# Altium PCB PCB1.PcbDoc
Units mm, origin at the board's own origin, x right, y up, seen from the top; angles counter-clockwise.
Board outline 164.2 x 225.1 mm, 2 copper layers (Top Layer, Bottom Layer); 32 components, 42 nets, 234 pads, 0 vias.
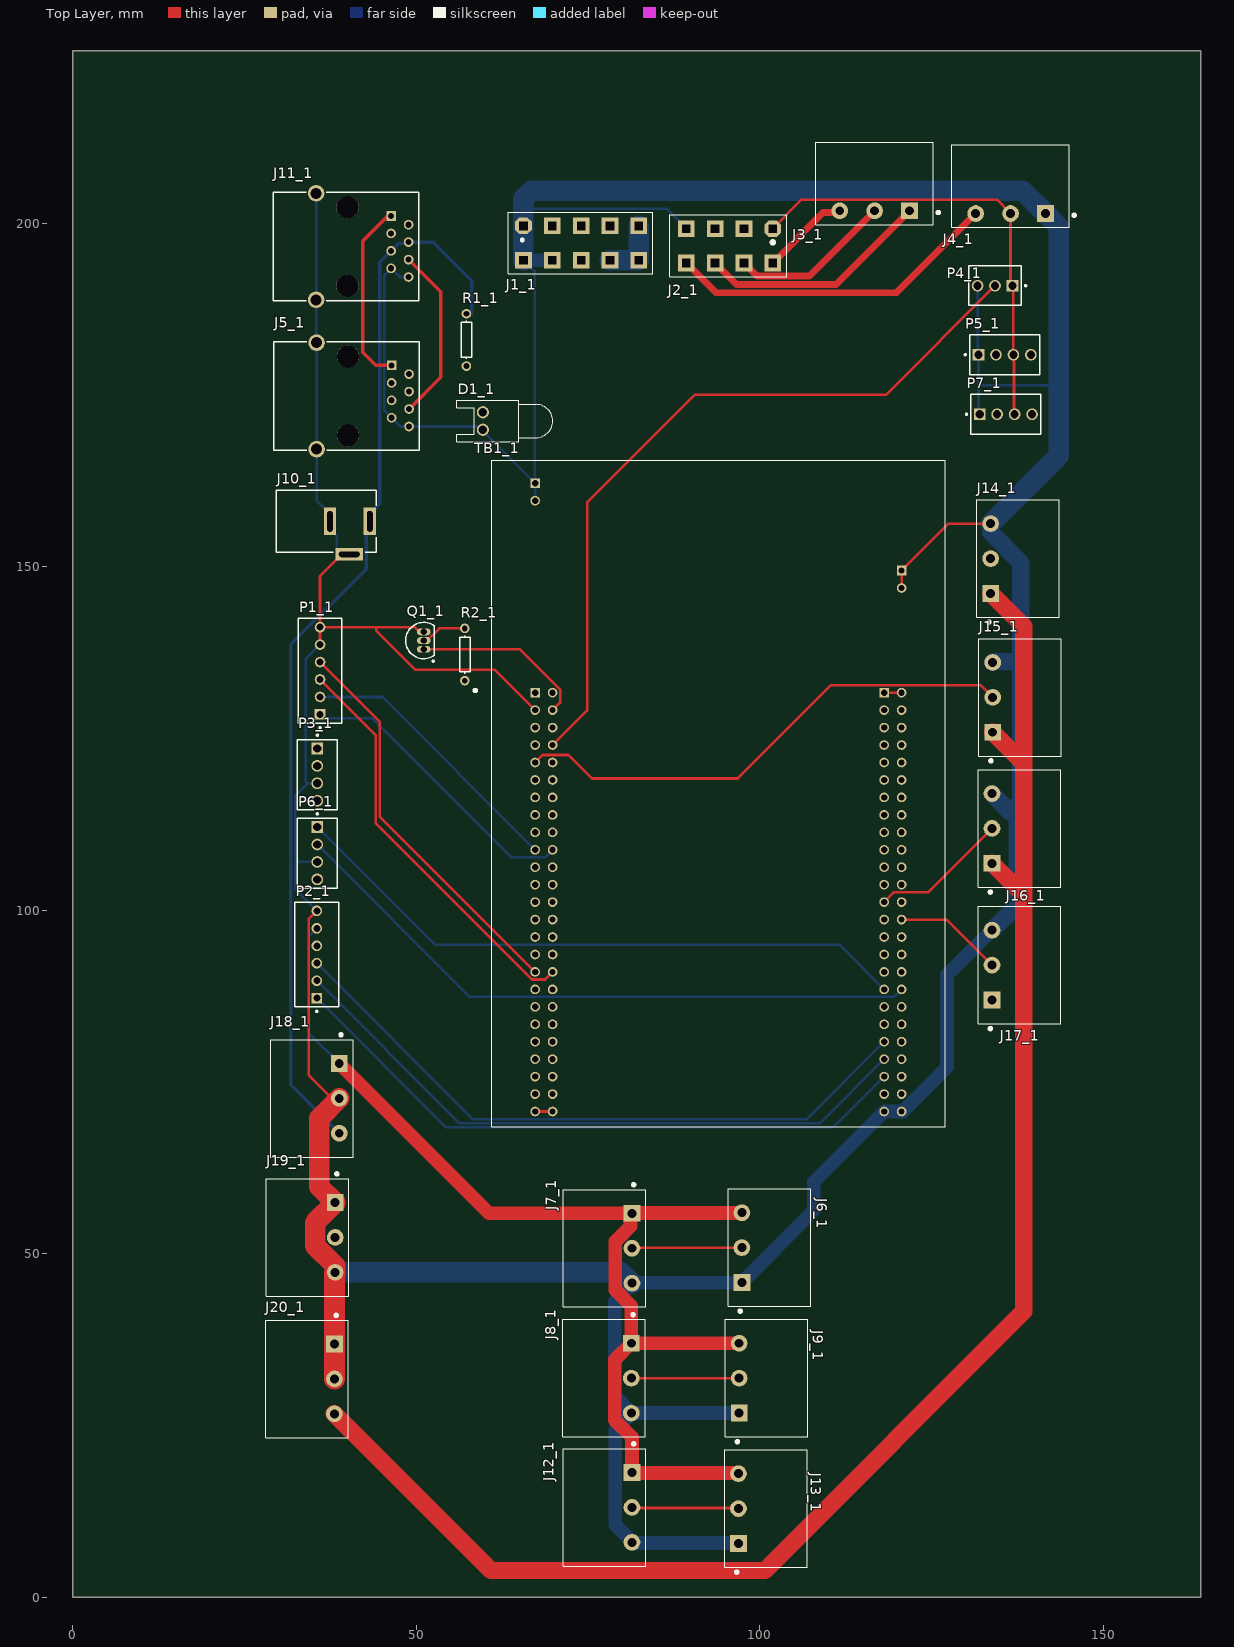
[diagram p0: Top Layer view]
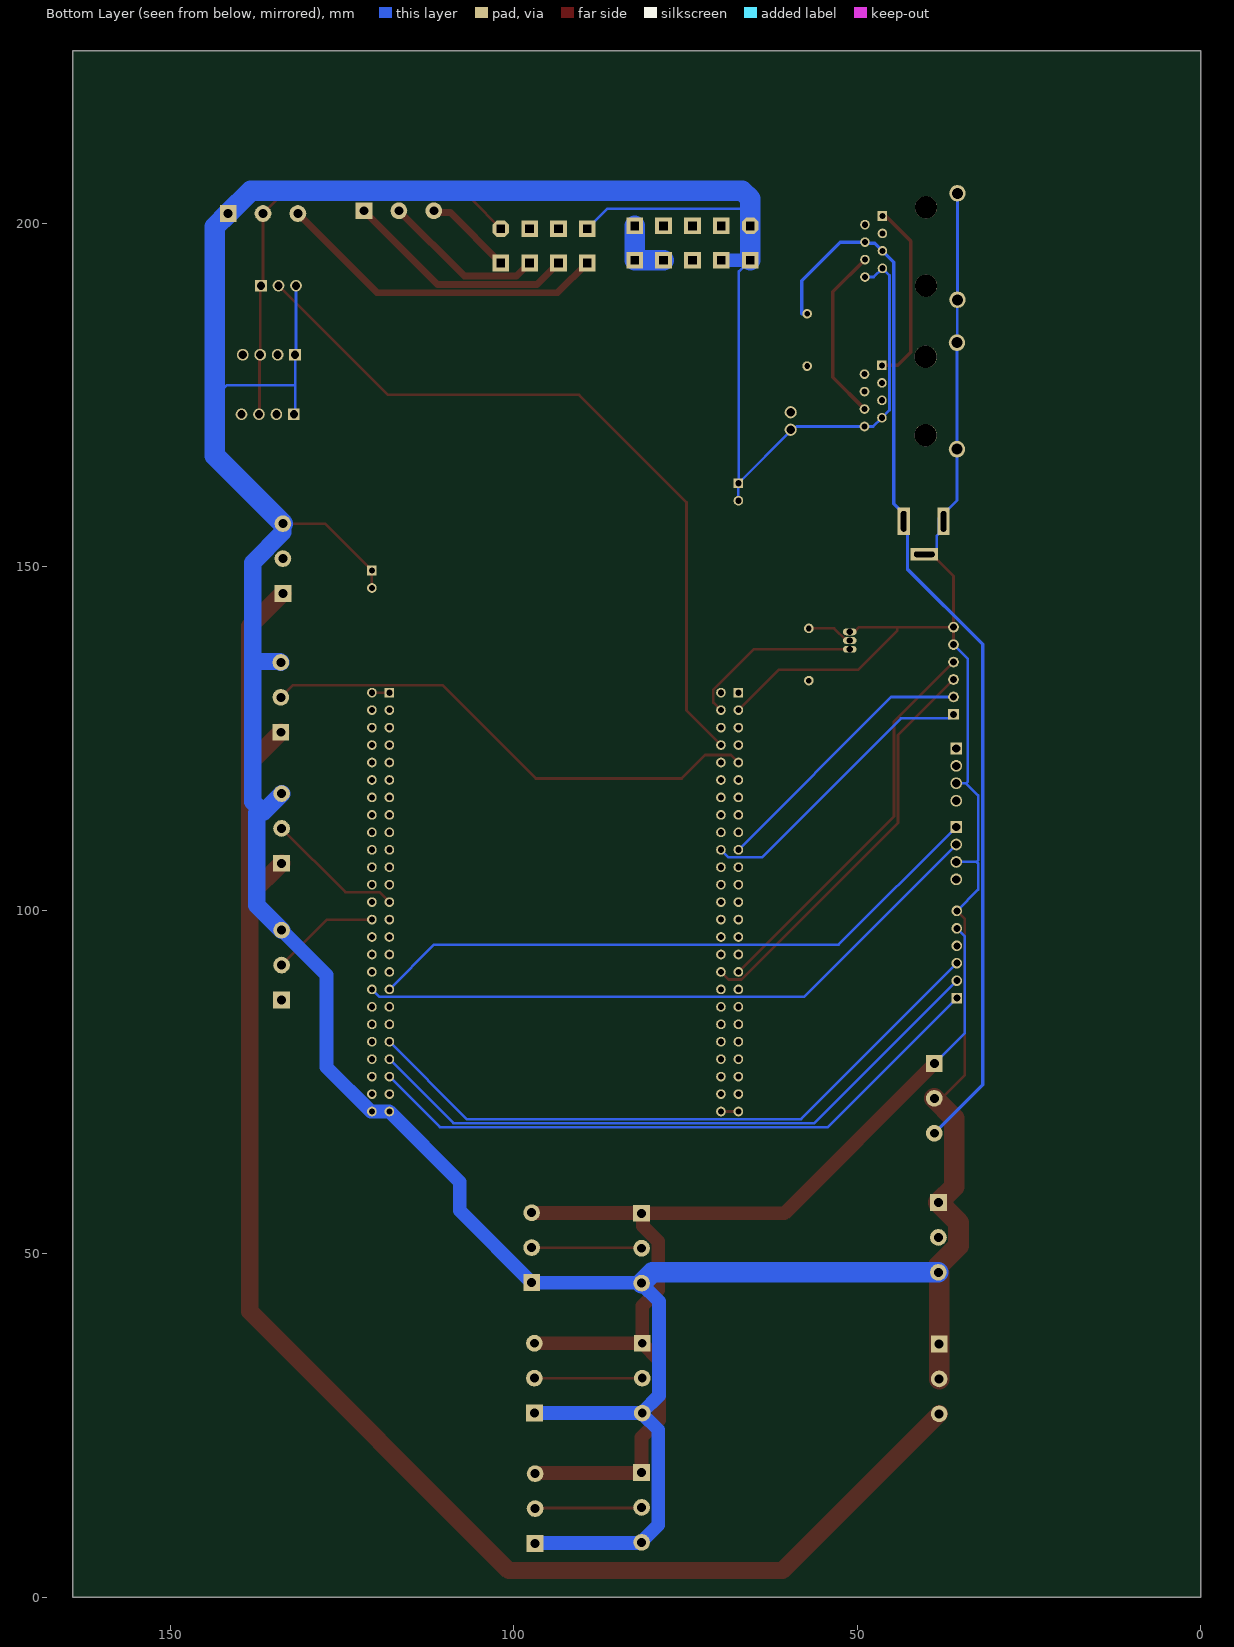
[diagram p1: Bottom Layer view, seen from below]

## Layer stack, top to bottom
Top Solder: solder mask 0.0102, Solder Resist, Dk 3.5
Top Layer: signal copper 0.0356
Dielectric 1: dielectric 0.32, FR-4, Dk 4.8
Bottom Layer: signal copper 0.0356
Bottom Solder: solder mask 0.0102, Solder Resist, Dk 3.5

## Board outline
0,0 164.2,0 164.2,225.1 0,225.1

## Design rules (kind name [scope] priority, off if disabled: settings)
Clearance [All] p1: gap=0.254 ignorepadtopadclearanceinfootprint=FALSE except(0: Arc-Hole Track-Hole SMDPad-Hole THPad-Hole Via-Hole Fill-Hole Poly-Hole Region-Hole Text-Hole)
PolygonConnect [All] p1: connectstyle=Relief reliefconductorwidth=0.254 reliefentries=4 polygonreliefangle="90 Angle" airgapwidth=0.254
RoutingVias [All] p1: holewidth=0.711 width=1.27 viastyle="Through Hole" minholewidth=0.711 minwidth=1.27 maxholewidth=0.711 maxwidth=1.27
SolderMaskExpansion [All] p1: expansion=0.102
Width [All] p1: maxlimit=0.254 minlimit=0.254 preferedwidth=0.254
30 further rules are at their usual default settings.

## Components (designator, comment, footprint, x,y, rotation, side; value= is the part's Value field where it differs from the comment)
D1_1 "LED0" LED-0 59.7,171.2 r90 top (schematic designator D1)
J1_1 "10 PIN MOLEX CLON" "10 pin molex" 82.4,199.6 r180 top (schematic designator J1)
J2_1 "8 PIN molex CLON" "8 PIN MOLEX CLON" 101.9,199.2 r180 top (schematic designator J2)
J3_1 "3 PIN GREEN" PHOENIX_MSTBA_2,5_3-G-5,08_1757255 116.72,201.8 r180 top (schematic designator J3)
J4_1 "3 PIN GREEN" PHOENIX_MSTBA_2,5_3-G-5,08_1757255 136.5,201.4 r180 top (schematic designator J4)
J5_1 "61500814221" 61500814221 39.87,174.85 r270 top (schematic designator J5)
J6_1 "3 PIN GREEN" PHOENIX_MSTBA_2,5_3-G-5,08_1757255 97.4,50.9 r90 top (schematic designator J6)
J7_1 "3 PIN GREEN" PHOENIX_MSTBA_2,5_3-G-5,08_1757255 81.4,50.8 r270 top (schematic designator J7)
J8_1 "3 PIN GREEN" PHOENIX_MSTBA_2,5_3-G-5,08_1757255 81.3,31.9 r270 top (schematic designator J8)
J9_1 "3 PIN GREEN" PHOENIX_MSTBA_2,5_3-G-5,08_1757255 97,31.9 r90 top (schematic designator J9)
J10_1 "694108301002" 694108301002 36.9,156.6 r270 top (schematic designator J10)
J11_1 "61500814221" 61500814221 39.8,196.6 r270 top (schematic designator J11)
J12_1 "3 PIN GREEN" PHOENIX_MSTBA_2,5_3-G-5,08_1757255 81.4,13.08 r270 top (schematic designator J12)
J13_1 "3 PIN GREEN" PHOENIX_MSTBA_2,5_3-G-5,08_1757255 96.9,12.92 r90 top (schematic designator J13)
J14_1 "3 PIN GREEN" PHOENIX_MSTBA_2,5_3-G-5,08_1757255 133.6,151.18 r90 top (schematic designator J14)
J15_1 "3 PIN GREEN" PHOENIX_MSTBA_2,5_3-G-5,08_1757255 133.9,130.98 r90 top (schematic designator J15)
J16_1 "3 PIN GREEN" PHOENIX_MSTBA_2,5_3-G-5,08_1757255 133.8,111.9 r90 top (schematic designator J16)
J17_1 "3 PIN GREEN" PHOENIX_MSTBA_2,5_3-G-5,08_1757255 133.8,92.02 r90 top (schematic designator J17)
J18_1 "3 PIN GREEN" PHOENIX_MSTBA_2,5_3-G-5,08_1757255 38.8,72.62 r270 top (schematic designator J18)
J19_1 "3 PIN GREEN" PHOENIX_MSTBA_2,5_3-G-5,08_1757255 38.2,52.375 r270 top (schematic designator J19)
J20_1 "3 PIN GREEN" PHOENIX_MSTBA_2,5_3-G-5,08_1757255 38.1,31.78 r270 top (schematic designator J20)
P1_1 "22-23-2061" MOLX-22-23-2061_V 36,134.85 r90 top (schematic designator P1)
P2_1 "22-23-2061" MOLX-22-23-2061_V 35.525,93.555 r90 top (schematic designator P2)
P3_1 "22-27-2041" MOLX-22-27-2041_V 35.6,119.739 r90 top (schematic designator P3)
P4_1 "22-27-2031" MOLX-22-27-2031_V 134.24,190.9 r180 top (schematic designator P4)
P5_1 "22-27-2041" MOLX-22-27-2041_V 135.645,180.85 r180 top (schematic designator P5)
P6_1 "22-27-2041" MOLX-22-27-2041_V 35.6,108.3 r90 top (schematic designator P6)
P7_1 "22-27-2041" MOLX-22-27-2041_V 135.82,172.175 r180 top (schematic designator P7)
Q1_1 "NPN" TO-226-AA 51.1,139.25 r0 top (schematic designator Q1)
R1_1 "Res1" AXIAL-0.3 57.3,183 r90 top value=1K (schematic designator R1)
R2_1 "Res1" AXIAL-0.3 57.064,137.215 r90 top value=1K (schematic designator R2)
TB1_1 "STM32F3DISCOVERY" SHIELD_STM32F3DISCOVERY 93.98,116.98 r0 top (schematic designator TB1)

## Footprints (in the part's own frame and the unit in brackets; to place one, negate y for a bottom-side part, rotate by r counter-clockwise, add the part's x,y. Pads: shape width x height; smd on the part's side, far side on the other; paste and mask are expansions set on the pad)
"8 PIN MOLEX CLON" [mm]
  oct 2.43x2.43 hole 1.2 square: 1(0,0)
  rect 2.43x2.43 hole 1.2 square: 2(4.2,0) 3(8.4,0) 4(12.6,0) 5(12.6,5) 6(8.4,5) 7(4.2,5) 8(0,5)
  silkscreen extent -2,-2 15,7, body extent -2.95,-13.5 15.15,5.5, height 11
"10 pin molex" [mm]
  oct 2.43x2.43 hole 1.2 square: 1(16.8,0)
  rect 2.43x2.43 hole 1.2 square: 2(12.6,0) 3(8.4,0) 4(4.2,0) 5(0,0) 6(16.8,5) 7(12.6,5) 8(8.4,5) 9(4.2,5) 10(0,5)
  silkscreen extent -2,-2 19,7, body extent -3.1,-13.6 19.3,5.4, height 11
61500814221 [mm] "Modular Jack Horizontal Shielded 8P8C Tab Down"
  rect 1.4x1.4 hole 0.9: 1(-4.445,6.55)
  round 1.4 hole 0.9: 2(-3.175,9.09) 3(-1.905,6.55) 4(-0.635,9.09) 5(0.635,6.55) 6(1.905,9.09) 7(3.175,6.55) 8(4.445,9.09)
  round 3.25 hole 3.25 unplated: MH1(-5.715,0.2) MH2(5.715,0.2)
  round 2.4 hole 1.6: S1(-7.75,-4.37) S2(7.75,-4.37)
  silkscreen extent -7.92,-10.6 7.92,10.6, body extent -7.9,-10.6 7.9,10.6, height 13.7
694108301002 [mm] "DC Power Jack Right Angled(6.4)"
  rect 4x1.8 hole 0.8 slot 3 at 0 deg: 1(0,6.35) 2(0,0.55)
  rect 1.8x4 hole 0.8 slot 3 at 90 deg: 3(4.8,3.35)
  silkscreen extent -4.5,-7.25 4.5,7.25, body extent -4.5,-7.25 5,7.25, height 10.75
AXIAL-0.3 [mm] "Axial Device, Thru-Hole; 2 Leads; 0.3 in Pin Spacing"
  round 1.4 hole 0.85: 1(-3.81,0) 2(3.81,0)
  silkscreen extent -2.77,-0.76 2.77,0.76
LED-0 [mil] "LED; 2 Leads"
  round 70 hole 50: 1(50,0) 2(-50,0)
  silkscreen extent -120,-400 120,150
MOLX-22-23-2061_V [mm] "THD, 6-Leads, Body 15.24x6.35mm, Pitch 2.54mm"
  rect 1.55x1.55 hole 1.02: 1(-6.35,0)
  round 1.55 hole 1.02: 2(-3.81,0) 3(-1.27,0) 4(1.27,0) 5(3.81,0) 6(6.35,0)
  silkscreen extent -8.39,-3.18 7.62,3.18, body extent -7.54,-3.25 7.54,3.1, height 10.67
MOLX-22-27-2031_V [mm] "Header, 3-Leads, Body 7.62x5.8mm, Pitch 2.54mm"
  rect 1.7x1.7 hole 1.19 paste+0: 1(-2.54,0)
  round 1.7 hole 1.19 paste+0: 2(0,0) 3(2.54,0)
  silkscreen extent -4.59,-2.92 3.81,2.88, body extent -3.81,-2.92 3.81,2.88, height 11.71
MOLX-22-27-2041_V [mm] "CONN, 4-Leads, Body 10.16x5.8mm, Pitch 2.54mm"
  rect 1.7x1.7 hole 1.19: 1(3.81,0)
  round 1.7 hole 1.19: 2(1.27,0) 3(-1.27,0) 4(-3.81,0)
  silkscreen extent -5.08,-2.9 5.85,2.9, body extent -5.08,-2.9 5.08,2.9, height 11.7
PHOENIX_MSTBA_2,5_3-G-5,08_1757255 [mm]
  rect 2.43x2.43 hole 1.3: 1(-5.08,0)
  round 2.43 hole 1.3: 2(0,0) 3(5.08,0)
  silkscreen extent -9.45,-10 8.54,2, body extent -7.62,-9.94 7.62,2.06, height 8.6
SHIELD_STM32F3DISCOVERY [mm]
  rect 1.408x1.408 hole 0.9: 1(-26.67,14.68) 51(24.13,14.68) 101(-26.67,45.16) 103(26.67,32.46)
  round 1.408 hole 0.9: 2(-24.13,14.68) 3(-26.67,12.14) 4(-24.13,12.14) 5(-26.67,9.6) 6(-24.13,9.6) 7(-26.67,7.06) 8(-24.13,7.06) 9(-26.67,4.52) 10(-24.13,4.52) 11(-26.67,1.98) 12(-24.13,1.98) 13(-26.67,-0.56) 14(-24.13,-0.56) 15(-26.67,-3.1) 16(-24.13,-3.1) 17(-26.67,-5.64) 18(-24.13,-5.64) 19(-26.67,-8.18) 20(-24.13,-8.18) 21(-26.67,-10.72) 22(-24.13,-10.72) 23(-26.67,-13.26) 24(-24.13,-13.26) 25(-26.67,-15.8) 26(-24.13,-15.8) 27(-26.67,-18.34) 28(-24.13,-18.34) 29(-26.67,-20.88) 30(-24.13,-20.88) 31(-26.67,-23.42) 32(-24.13,-23.42) 33(-26.67,-25.96) 34(-24.13,-25.96) 35(-26.67,-28.5) 36(-24.13,-28.5) 37(-26.67,-31.04) 38(-24.13,-31.04) 39(-26.67,-33.58) 40(-24.13,-33.58) 41(-26.67,-36.12) 42(-24.13,-36.12) 43(-26.67,-38.66) 44(-24.13,-38.66) 45(-26.67,-41.2) 46(-24.13,-41.2) 47(-26.67,-43.74) 48(-24.13,-43.74) 49(-26.67,-46.28) 50(-24.13,-46.28) 52(26.67,14.68) 53(24.13,12.14) 54(26.67,12.14) 55(24.13,9.6) 56(26.67,9.6) 57(24.13,7.06) 58(26.67,7.06) 59(24.13,4.52) 60(26.67,4.52) 61(24.13,1.98) 62(26.67,1.98) 63(24.13,-0.56) 64(26.67,-0.56) 65(24.13,-3.1) 66(26.67,-3.1) 67(24.13,-5.64) 68(26.67,-5.64) 69(24.13,-8.18) 70(26.67,-8.18) 71(24.13,-10.72) 72(26.67,-10.72) 73(24.13,-13.26) 74(26.67,-13.26) 75(24.13,-15.8) 76(26.67,-15.8) 77(24.13,-18.34) 78(26.67,-18.34) 79(24.13,-20.88) 80(26.67,-20.88) 81(24.13,-23.42) 82(26.67,-23.42) 83(24.13,-25.96) 84(26.67,-25.96) 85(24.13,-28.5) 86(26.67,-28.5) 87(24.13,-31.04) 88(26.67,-31.04) 89(24.13,-33.58) 90(26.67,-33.58) 91(24.13,-36.12) 92(26.67,-36.12) 93(24.13,-38.66) 94(26.67,-38.66) 95(24.13,-41.2) 96(26.67,-41.2) 97(24.13,-43.74) 98(26.67,-43.74) 99(24.13,-46.28) 100(26.67,-46.28) 102(-26.67,42.62) 104(26.67,29.92)
  silkscreen extent -35.6,-48.5 33,48.5
TO-226-AA [mm] "TO, Flat Index; 3 In-Line, Axial Leads; Body Dia. 4.8mm; Leads 0.55 x 0.51 mm (max)"
  oval 2x1 hole 0.9: 1(0,-1.27) 2(0,0) 3(0,1.27)
  silkscreen extent -2.65,-3.13 1.52,2.65, body extent -2.65,-2.66 1.52,2.66, height 5.33

## Part data
D1_1: "Typical INFRARED GaAs LED", LatestRevisionDate=08-Jul-2005, LatestRevisionNote="Mech Layer 1 removed.", PackageDescription="LED; 2 Leads", PackageReference=LED-0, Published=8-Jun-2000, Publisher="Altium Limited"
J2_1: Color=Black, Manufacturer 1=Molex, Manufacturer Part Number 1=76825-0008, Supplier Part Number 1=WM11972-ND, ComponentLink1Description=http://www.alliedelec.com/images/products/datasheets/bm/BrandonData/70717241.pdf?src-supplier=Allied+Electronics, ComponentLink1URL=http://www.alliedelec.com/images/products/datasheets/bm/BrandonData/70717241.pdf?src-supplier=Allied+Electronics, ComponentLink2Description=http://www.farnell.com/datasheets/2216656.pdf?src-supplier=Farnell, ComponentLink2URL=http://www.farnell.com/datasheets/2216656.pdf?src-supplier=Farnell, ComponentLink3Description=http://www.farnell.com/datasheets/1968956.pdf?src-supplier=Element14, ComponentLink3URL=http://www.farnell.com/datasheets/1968956.pdf?src-supplier=Element14, ComponentLink4Description=http://www.farnell.com/datasheets/2001779.pdf?src-supplier=Element14, ComponentLink4URL=http://www.farnell.com/datasheets/2001779.pdf?src-supplier=Element14, ComponentLink5Description=http://www.farnell.com/datasheets/2216656.pdf?src-supplier=Newark, ComponentLink5URL=http://www.farnell.com/datasheets/2216656.pdf?src-supplier=Newark, ComponentLink6Description=https://www.molex.com/pdm_docs/sd/768250008_sd.pdf?src-supplier=Digi-Key, ComponentLink6URL=https://www.molex.com/pdm_docs/sd/768250008_sd.pdf?src-supplier=Digi-Key, Contact Material=Copper, Contact Plating=Tin, Gender=Male, Mount="Through Hole", Number of Circuits=8, Number of Contacts=8, Number of Pins=8, Number of Rows=2, Orientation="Right Angle", Pitch=5.7mm, Pricing 1="1=2.83000, 10=2.72000, 25=2.49360, 50=2.38040, 100=2.26700, 250=1.98364, 672=1.92695, 1344=1.64357, 2688=1.53022 (USD)", REACH SVHC=Unknown, RoHS=Yes, Stock 1=794, Supplier 1=Digi-Key, Termination="Through Hole"
J3_1 J4_1 J6_1 J7_1 J8_1 J9_1 J12_1 J13_1 J14_1 J15_1 J16_1 J17_1 J18_1 J19_1 J20_1: Color=Grey,Green, Current=15A, Current Rating=12A, Flammability Rating="UL94 V-0", Housing Color=Green, Manufacturer 1="Phoenix Contact", Manufacturer Part Number 1=1757255, Package Quantity=50, Supplier Part Number 1=277-1107-ND, Voltage=300V, Voltage Rating=250V, Voltage Rating (DC)=320V, Approvals=UL,CSA,VDE,EN, ComponentLink1Description=https://datasheet.ciiva.com/15197/getdatasheetpartid-176351-15197329.pdf?src-supplier=Verical, ComponentLink1URL=https://datasheet.ciiva.com/15197/getdatasheetpartid-176351-15197329.pdf?src-supplier=Verical, ComponentLink2Description=https://datasheet.ciiva.com/16096/1757255-16096404.pdf?src-supplier=Onlinecomponents.com, ComponentLink2URL=https://datasheet.ciiva.com/16096/1757255-16096404.pdf?src-supplier=Onlinecomponents.com, ComponentLink3Description=https://datasheet.ciiva.com/7630/1697152-7630840.pdf?src-supplier=Element14, ComponentLink3URL=https://datasheet.ciiva.com/7630/1697152-7630840.pdf?src-supplier=Element14, ComponentLink4Description=https://datasheet.ciiva.com/795/1757255-795421.pdf?src-supplier=Digi-Key, ComponentLink4URL=https://datasheet.ciiva.com/795/1757255-795421.pdf?src-supplier=Digi-Key, ComponentLink5Description=https://datasheet.ciiva.com/29210/569707-da-01-en-grundgehaeuse-1757255-250-st-29210878.pdf?src-supplier=Conrad, ComponentLink5URL=https://datasheet.ciiva.com/29210/569707-da-01-en-grundgehaeuse-1757255-250-st-29210878.pdf?src-supplier=Conrad, Connector Type=Plug, Contact Material=Tin, Contact Plating=Tin, Depth=12mm, Gender=Male, Height=12.1mm, Housing Material=Polybutylene, Lead Free="Lead Free", Length=17.24mm, Max Current Rating=12A, Mount="Through Hole", Number of Contacts=3, Number of Levels=1, Number of Poles=3, Number of Positions=3, Number of Positions Per Level=3, Number of Rows=1, Orientation="Right Angle", Packaging=Bulk, Pitch=5.08mm, Pricing 1="1=1.03000, 10=0.99000, 50=0.94720, 100=0.92130, 250=0.86100, 500=0.79212, 1000=0.73185, 2500=0.69741, 5000=0.65436 (USD)", REACH SVHC="No SVHC", RoHS=Yes, Stock 1=4025, Supplier 1=Digi-Key, Termination=Solder, Weight=5.396916oz, Width=17.16mm
J5_1 J11_1: library part RJ45, "Modular Jack WR-MJ, Tab Down, Shielded, Horizontal Entry, THT, 8P8C", Color=Black, Contact Resistance=20mOhm, Current Rating=1.5A, Flammability Rating="UL94 V-0", Insulation Resistance=500MR, Manufacturer="Wurth Elektronik", Manufacturer 1="Wurth Electronics", Max Operating Temperature=85°C, Min Operating Temperature=-40°C, Operating Temperature=-40to85degC, Package Quantity=80, Supplier Part Number 1=732-2111-ND, Voltage Rating (AC)=120V, Withstanding Voltage=1000VAC, Working Voltage=120VAC, Compliance=Leadfree/RoHS, ComponentLink1Description=https://datasheet.ciiva.com/1108/76605-1108145.pdf?src-supplier=Element14, ComponentLink1URL=https://datasheet.ciiva.com/1108/76605-1108145.pdf?src-supplier=Element14, ComponentLink2Description=https://datasheet.ciiva.com/4561/61500814221-78459-4561634.pdf?src-supplier=Mouser, ComponentLink2URL=https://datasheet.ciiva.com/4561/61500814221-78459-4561634.pdf?src-supplier=Mouser, ComponentLink3Description=https://datasheet.ciiva.com/686/61500814221-686710.pdf?src-supplier=Digi-Key, ComponentLink3URL=https://datasheet.ciiva.com/686/61500814221-686710.pdf?src-supplier=Digi-Key, ComponentLink4Description=https://datasheet.ciiva.com/11726/0900766b80f88678-11726201.pdf?src-supplier=RSComponents, ComponentLink4URL=https://datasheet.ciiva.com/11726/0900766b80f88678-11726201.pdf?src-supplier=RSComponents, ComponentLink5Description=https://datasheet.ciiva.com/48689/001088220-da-01-en-wr-com-modular-jack-61500814221-48689546.pdf?src-supplier=Conrad, ComponentLink5URL=https://datasheet.ciiva.com/48689/001088220-da-01-en-wr-com-modular-jack-61500814221-48689546.pdf?src-supplier=Conrad, Connector Type=Jack,RJ45,Socket, Contact Material="Copper Alloy,Copper", Contact Plating=Gold, Datasheet URL=https://katalog.we-online.de/em/datasheet/61500814221.pdf, Depth=21.2mm, Direction=Down, Entrance=Horizontal, Gender=Female, Height=19.95mm, Housing Material=PBT, Length=13.65mm, Manufacturer Part Number 1=61500814221, Manufacturer URL=http://www.we-online.de, Mating Cycles=500, Mount="Through Hole,PCB", Mounting Technology=THT, Number of Contacts=8, Number of Ports=1, Number of Positions=8, Number of Rows=1, Orientation="Right Angle", Package Reference=61500814221, Packaging=Tray, Part Number=61500814221, Pin Number=8P8C, Port=1x1, Pricing 1="1=2.38000, 10=2.33000, 50=2.24000, 100=2.15000, 500=2.06100 (USD)", Publisher=WurthElektronik, Rated Current=1.5A, REACH SVHC=Unknown, RoHS=Yes, Shielding=Shielded, Stock 1=262, Supplier 1=Digi-Key, Termination="Through Hole", Width=15.88mm
J10_1: library part "DC POWER JACK", "DC Power Jack Connector WR-DC, Male, Right Angled, THT, 5 A, 24 V", Manufacturer="Wurth Elektronik", Operating Temperature=-40to85degC, Rated Current=5A, Working Voltage=24V, Datasheet URL=http://katalog.we-online.de/em/datasheet/6941xx301002.pdf, Gender=Male, Manufacturer URL=http://www.we-online.de, Mounting Technology=THT, Opening Diameter=6.4mm, Orientation=RightAngled, Package Reference=694108301002, Packaging=Bag, Part Number=694108301002, Plug Inner Diameter=2.55mm, Plug Outer Diameter=5.5mm, Publisher=WurthElektronik
P1_1 P2_1: library part CMP-2000-05536-1, "Male Header, Pitch 2.54 mm, 1 x 6 Position, Height 10.67 mm, Tail Length 3.56 mm, 0 to 70 degC, RoHS, Bulk", Current Rating=4A, Manufacturer=Molex, Package Description="Male Header, Pitch 2.54 mm, 1 x 6 Position, Height 10.67 mm, Tail Length 3.56 mm", Voltage Rating=250V, =002223206122-23-2061-PBA-6373-06A102, Brand=Molex, Contact Material=Brass, Contact Plating=Tin, Datasheet URL=https://datasheet.ciiva.com/19460/232303-19460895.pdf, Datasheet Version="Rev. P, 09/2001", Factory Pack Quantity=1000, Housing Material=Nylon, Manufacturer URL=http://www.molex.com/, Mounting Angle=Vertical, Mounting Style=ThroughHole, Mounting Technology=ThroughHole, Number of Positions=6, Number of Positions / Contacts=6, Number of Rows=1, Package Reference=22-23-2061, Packaging=Bulk, Pitch=2.54mm, Product Category=.100K.K.Connectors, Product Type=Headers, RoHS=Details, Series=6373, Termination Style=ThroughHole, Tradename=KK, Type=PinStrip
P3_1 P5_1 P6_1 P7_1: library part CMP-2000-05243-1, "Male Header, Pitch 2.54 mm, 1 x 4 Position, Height 11.7 mm, Tail Length 3.56 mm, RoHS, Bulk", Current Rating=4A, Manufacturer=Molex, Operating Temperature=0degCto+75degC, Voltage Rating=250V, Contact Material=Tinplatedbrass, Datasheet URL=http://www.molex.com/pdm_docs/sd/022272041_sd.pdf, Datasheet Version="Rev. F, 06/2009", Housing Material=Nylon(UL94V-0), Manufacturer URL=http://www.molex.com/
P4_1: library part CMP-2000-05538-1, "Male Header, Pitch 2.54 mm, 1 x 3 Position, Height 11.7 mm, Tail Length 3.56 mm, -40 to 80 degC, RoHS, Bulk", Current Rating=4A, Manufacturer=Molex, Operating Temperature=0°Cto+75°C, Package Description="Male Header, Pitch 2.54 mm, 1 x 3 Position, Height 11.7 mm, Tail Length 3.56 mm", Voltage Rating=250V, Contact Material=Tinplatedbrass, Datasheet URL=http://www.molex.com/webdocs/datasheets/pdf/en-us/0022272031_PCB_HEADERS.pdf, Datasheet Version=06/2016, Housing Material=Nylon(UL94V-0), Manufacturer URL=http://www.molex.com/, Mounting Technology=ThroughHole, Package Reference=22-27-2031, Package URL=http://www.molex.com/pdm_docs/sd/022272031_sd.pdf
Q1_1: "NPN Bipolar Transistor", Code_JEDEC=TO-226-AA, LatestRevisionDate=17-Jul-2002, LatestRevisionNote="Re-released for DXP Platform.", PackageDescription="TO, Flat Index; 3 In-Line, Axial Leads; Body Dia. 4.8mm; Leads 0.55 x 0.51 mm (max)", PackageReference=TO-226-AA, Published=8-Jun-2000, Publisher="Altium Limited"
R1_1 R2_1: "Resistor", LatestRevisionDate=17-Jul-2002, LatestRevisionNote="Re-released for DXP Platform.", PackageDescription="Axial Device, Thru-Hole; 2 Leads; 0.3 in Pin Spacing", PackageReference=AXIAL-0.3, Published=8-Jun-2000, Publisher="Altium Limited"
TB1_1: "STM32F303VCT6 Discovery STM32F3 ARM® Cortex®-M4 MCU 32-Bit Embedded Evaluation Board", Package="LQFP-100 STMicroelectronics", Availability=Unavailable, MF=STMicroelectronics, MP=STM32F3DISCOVERY, Price=None, SnapEDA_Link=https://www.snapeda.com/parts/STM32F3DISCOVERY/STMicroelectronics/view-part/10815/?ref=snap

## Nets (pads, with @x,y where several pads share a name; then routed paths per layer and width w, separated by ;. In a path a pad name is that pad's centre, name@x,y a point inside that pad or via, vN(x,y) a via of type N, cw(c..) or ccw(c..) an arc to the next point about the centre after c; other vN are vias at no path point)
5V: 
5V_SERVO: 
12V: 
24V: 
ACT1A: 
ACT1B: 
ACT2A: 
ACT2B: 
"ARM ENCODER 1": 
"ARM ENCODER 2": 
"ARM SERVO 1": 
"CAM_SERVO 1": 
"CAM_SERVO 2": 
"CAM_SERVO 3": 
"CAM_SERVO 4": 
"EMER RX": 
"EMER TX": 
"H1 GPIO1": 
"H1 GPIO2": 
"H2 GPIO1": 
"H2 GPIO2": 
"JETSON RX": 
"JETSON TX": 
NetD1_1: 
NetQ1_2: 
NRST: 
RST: 
RX+: 
RX-: 
S1: 
S2: 
S3: 
"SABERTOOTH RX": 
"SABERTOOTH TX": 
"SMART ELEX RX": 
"SMART ELEX TX": 
STATUS1: 
STATUS2: 
STATUS3: 
TT_POT: 
TX+: 
TX-: 
pads on no net: D1_1.1 D1_1.2 J1_1.1 J1_1.2 J1_1.3 J1_1.4 J1_1.5 J1_1.6 J1_1.7 J1_1.8 J1_1.9 J1_1.10 J2_1.1 J2_1.2 J2_1.3 J2_1.4 J2_1.5 J2_1.6 J2_1.7 J2_1.8 J3_1.1 J3_1.2 J3_1.3 J4_1.1 J4_1.2 J4_1.3 J5_1.1 J5_1.2 J5_1.3 J5_1.4 J5_1.5 J5_1.6 J5_1.7 J5_1.8 J5_1.MH1 J5_1.MH2 J5_1.S1 J5_1.S2 J6_1.1 J6_1.2 J6_1.3 J7_1.1 J7_1.2 J7_1.3 J8_1.1 J8_1.2 J8_1.3 J9_1.1 J9_1.2 J9_1.3 J10_1.1 J10_1.2 J10_1.3 J11_1.1 J11_1.2 J11_1.3 J11_1.4 J11_1.5 J11_1.6 J11_1.7 J11_1.8 J11_1.MH1 J11_1.MH2 J11_1.S1 J11_1.S2 J12_1.1 J12_1.2 J12_1.3 J13_1.1 J13_1.2 J13_1.3 J14_1.1 J14_1.2 J14_1.3 J15_1.1 J15_1.2 J15_1.3 J16_1.1 J16_1.2 J16_1.3 J17_1.1 J17_1.2 J17_1.3 J18_1.1 J18_1.2 J18_1.3 J19_1.1 J19_1.2 J19_1.3 J20_1.1 J20_1.2 J20_1.3 P1_1.1 P1_1.2 P1_1.3 P1_1.4 P1_1.5 P1_1.6 P2_1.1 P2_1.2 P2_1.3 P2_1.4 P2_1.5 P2_1.6 P3_1.1 P3_1.2 P3_1.3 P3_1.4 P4_1.1 P4_1.2 P4_1.3 P5_1.1 P5_1.2 P5_1.3 P5_1.4 P6_1.1 P6_1.2 P6_1.3 P6_1.4 P7_1.1 P7_1.2 P7_1.3 P7_1.4 Q1_1.1 Q1_1.2 Q1_1.3 R1_1.1 R1_1.2 R2_1.1 R2_1.2 TB1_1.1 TB1_1.2 TB1_1.3 TB1_1.4 TB1_1.5 TB1_1.6 TB1_1.7 TB1_1.8 TB1_1.9 TB1_1.10 TB1_1.11 TB1_1.12 TB1_1.13 TB1_1.14 TB1_1.15 TB1_1.16 TB1_1.17 TB1_1.18 TB1_1.19 TB1_1.20 TB1_1.21 TB1_1.22 TB1_1.23 TB1_1.24 TB1_1.25 TB1_1.26 TB1_1.27 TB1_1.28 TB1_1.29 TB1_1.30 TB1_1.31 TB1_1.32 TB1_1.33 TB1_1.34 TB1_1.35 TB1_1.36 TB1_1.37 TB1_1.38 TB1_1.39 TB1_1.40 TB1_1.41 TB1_1.42 TB1_1.43 TB1_1.44 TB1_1.45 TB1_1.46 TB1_1.47 TB1_1.48 TB1_1.49 TB1_1.50 TB1_1.51 TB1_1.52 TB1_1.53 TB1_1.54 TB1_1.55 TB1_1.56 TB1_1.57 TB1_1.58 TB1_1.59 TB1_1.60 TB1_1.61 TB1_1.62 TB1_1.63 TB1_1.64 TB1_1.65 TB1_1.66 TB1_1.67 TB1_1.68 TB1_1.69 TB1_1.70 TB1_1.71 TB1_1.72 TB1_1.73 TB1_1.74 TB1_1.75 TB1_1.76 TB1_1.77 TB1_1.78 TB1_1.79 TB1_1.80 TB1_1.81 TB1_1.82 TB1_1.83 TB1_1.84 TB1_1.85 TB1_1.86 TB1_1.87 TB1_1.88 TB1_1.89 TB1_1.90 TB1_1.91 TB1_1.92 TB1_1.93 TB1_1.94 TB1_1.95 TB1_1.96 TB1_1.97 TB1_1.98 TB1_1.99 TB1_1.100 TB1_1.101 TB1_1.102 TB1_1.103 TB1_1.104
copper on no net: | length 2599.2
  Top Layer w0.381: 35.525,99.905 34.356,98.736 34.356,75.984 37.72,72.62 ; 36,133.58 44.087,125.493 44.087,112.691 66.856,89.922 68.753,89.922 69.85,91.02 ; 36,136.12 44.671,127.449 44.671,113.659 67.31,91.02 ; 36,138.66 36,141.2 ; 40.25,151.8 39.15,151.8 36,148.65 36,141.2 ; 51.1,137.98 65.083,137.98 70.948,132.115 70.948,130.218 69.85,129.12 ; 51.1,139.25 51.6,139.25 53.375,141.025 57.064,141.025 ; 51.1,140.52 50.445,140.52 49.765,141.2 44.2,141.2 ; 67.31,70.7 69.85,70.7 69.771,70.621 ; 67.31,121.5 68.408,122.598 72.147,122.598 75.574,119.171 96.778,119.171 110.364,132.758 132.122,132.758 133.9,130.98 ; 67.31,129.12 61.441,134.989 49.872,134.989 44.2,140.661 44.2,141.2 ; 69.85,124.04 74.871,129.061 74.871,159.357 90.517,175.002 118.342,175.002 134.24,190.9 ; 82.1,31.9 97.8,31.9 ; 82.2,13.08 82.28,13 97.62,13 ; 82.2,50.8 82.25,50.85 98.15,50.85 ; 101.9,199.2 106.109,203.409 134.491,203.409 136.5,201.4 136.5,191.18 136.915,190.765 136.915,180.85 137.003,180.763 137.003,172.263 137.09,172.175 ; 118.11,101.18 119.553,102.622 124.522,102.622 133.8,111.9 ; 118.11,131.66 120.65,131.66 ; 120.65,98.64 127.18,98.64 133.8,92.02 ; 120.65,146.9 120.65,149.44 127.47,156.26 133.6,156.26 ; 36,141.2 44.2,141.2
  Top Layer w0.5: 46.35,201.045 45.845,201.045 42.2,197.4 42.2,181.2 44.105,179.295 46.42,179.295 ; 48.89,194.695 53.588,189.997 53.588,177.573 48.96,172.945
  Top Layer w1: 89.3,194.2 93.625,189.875 119.895,189.875 131.42,201.4 ; 93.5,194.2 96.621,191.079 111.079,191.079 121.8,201.8 ; 97.7,194.2 99.618,192.282 107.202,192.282 116.72,201.8 ; 101.9,194.2 109.226,201.526 111.366,201.526 111.64,201.8
  Top Layer w2: 39.015,77.485 60.62,55.88 81.4,55.88 81.185,55.665 81.185,54.005 78.982,51.802 78.982,44.718 81.3,42.4 81.3,36.98 ; 81.615,55.93 97.35,55.93 97.4,55.98 ; 96.9,18 96.82,18.08 81.48,18.08 81.4,18.16 81.4,23.3 78.882,25.818 78.882,34.562 81.3,36.98 ; 97,36.98 81.3,36.98
  Top Layer w2.54: 38.1,26.7 60.9,3.9 100.7,3.9 138.4,41.6 138.4,102.22 ; 133.6,146.1 138.4,141.3 138.4,121.4 ; 133.8,106.82 138.4,102.22 ; 133.9,125.9 138.4,121.4 ; 138.4,102.22 138.4,121.4
  Top Layer w3: 38.1,31.78 38.1,36.86 38.1,47.195 38.2,47.295 38.2,48.248 35.282,51.166 35.282,54.537 38.2,57.455 35.882,59.773 35.882,69.702 38.8,72.62
  Bottom Layer w0.381: 35.43,204.35 35.43,188.85 35.465,188.815 35.465,182.635 35.5,182.6 35.5,167.1 35.5,159.65 38.159,156.99 38.159,154.79 38.44,154.51 38.44,152.509 39.15,151.8 40.25,151.8 41.05,151.8 ; 35.525,87.205 54.296,68.434 110.764,68.434 118.11,75.78 ; 35.525,89.745 56.252,69.018 108.808,69.018 118.11,78.32 ; 35.525,92.285 58.208,69.602 106.853,69.602 118.11,80.86 ; 35.525,97.365 34.356,96.196 34.356,82.144 38.8,77.7 ; 35.525,99.905 32.407,103.023 32.407,106.807 32.63,107.03 ; 35.6,107.03 32.63,107.03 ; 35.6,109.57 57.788,87.382 119.553,87.382 120.65,88.48 ; 35.6,112.11 52.708,95.002 111.588,95.002 118.11,88.48 ; 35.6,118.469 34.169,118.469 ; 36,128.5 36.584,127.915 43.639,127.915 63.853,107.702 68.753,107.702 69.85,108.8 ; 36,131.04 45.07,131.04 67.31,108.8 ; 36,138.66 33.946,136.606 33.946,118.692 34.169,118.469 ; 48.89,192.155 48.889,192.157 47.619,192.157 46.35,193.425 45.326,192.401 45.326,172.769 46.42,171.675 47.688,170.407 48.96,170.407 48.962,170.405 58.847,170.405 59.322,169.93 59.7,169.93 59.7,169.75 67.234,162.217 ; 65.6,194.6 67.234,192.966 67.234,162.217 ; 65.6,201.5 66.207,202.107 86.393,202.107 89.3,199.2 ; 67.31,159.6 67.31,162.14 67.234,162.217 ; 131.7,190.9 131.7,180.985 131.835,180.85 131.835,176.4 ; 132.01,172.175 131.835,172.35 131.835,176.4 ; 137.29,114.29 137.44,114.14 ; 137.35,136.75 137.5,136.9 ; 143.32,165.98 143.51,166.17 ; 143.51,174.69 141.8,176.4 131.835,176.4 ; 32.63,107.03 32.407,107.253 32.407,116.707 34.169,118.469
  Bottom Layer w0.5: 38.8,67.54 31.763,74.577 31.763,138.7 42.703,149.64 42.703,156.053 43.25,156.6 ; 43.6,158.05 44.683,159.133 44.683,194.298 47.448,197.063 48.718,197.063 48.89,197.235 52.504,197.235 58.1,191.639 58.1,186.81
  Bottom Layer w2: 65.6,194.6 69.8,194.6 ; 81.4,45.72 81.4,45.604 78.882,43.085 78.882,29.355 81.3,26.936 81.3,26.82 81.3,26.704 78.982,24.385 78.982,10.535 81.596,7.92 96.82,7.92 ; 81.499,26.82 97,26.82 ; 81.516,45.72 81.566,45.77 97.35,45.77 ; 97.4,45.82 107.863,56.283 107.863,60.452 118.11,70.7 120.65,70.7 120.807,70.7 127.263,77.155 127.263,90.563 133.8,97.1
  Bottom Layer w2.54: 133.6,156.26 133.6,154.982 138,150.582 138,115.8 136.49,114.29 ; 133.8,97.1 137.44,100.74 137.44,114.14 ; 133.8,116.98 136.49,114.29 ; 133.9,136.06 134.04,136.2 137.9,136.2 ; 137.29,114.29 136.49,114.29
  Bottom Layer w3: 38.2,47.295 79.825,47.295 81.4,45.72 ; 65.6,194.6 65.6,199.6 65.6,201.5 65.6,203.572 66.747,204.718 138.262,204.718 141.58,201.4 143.51,199.47 143.51,174.69 143.51,166.17 ; 78.2,194.6 82.4,194.6 82.4,199.6 ; 133.6,156.26 143.32,165.98